# Altium PCB PCB1.PcbDoc (part 6 of 9)
Units mm, origin at the board's own origin, x right, y up, seen from the top; angles counter-clockwise.
Board outline 227 x 102 mm, 4 copper layers (Top Layer, MidLayer1, MidLayer2, Bottom Layer); 425 components, 426 nets, 1455 pads, 440 vias.
Unrouted connection lines stored in the file: 2.
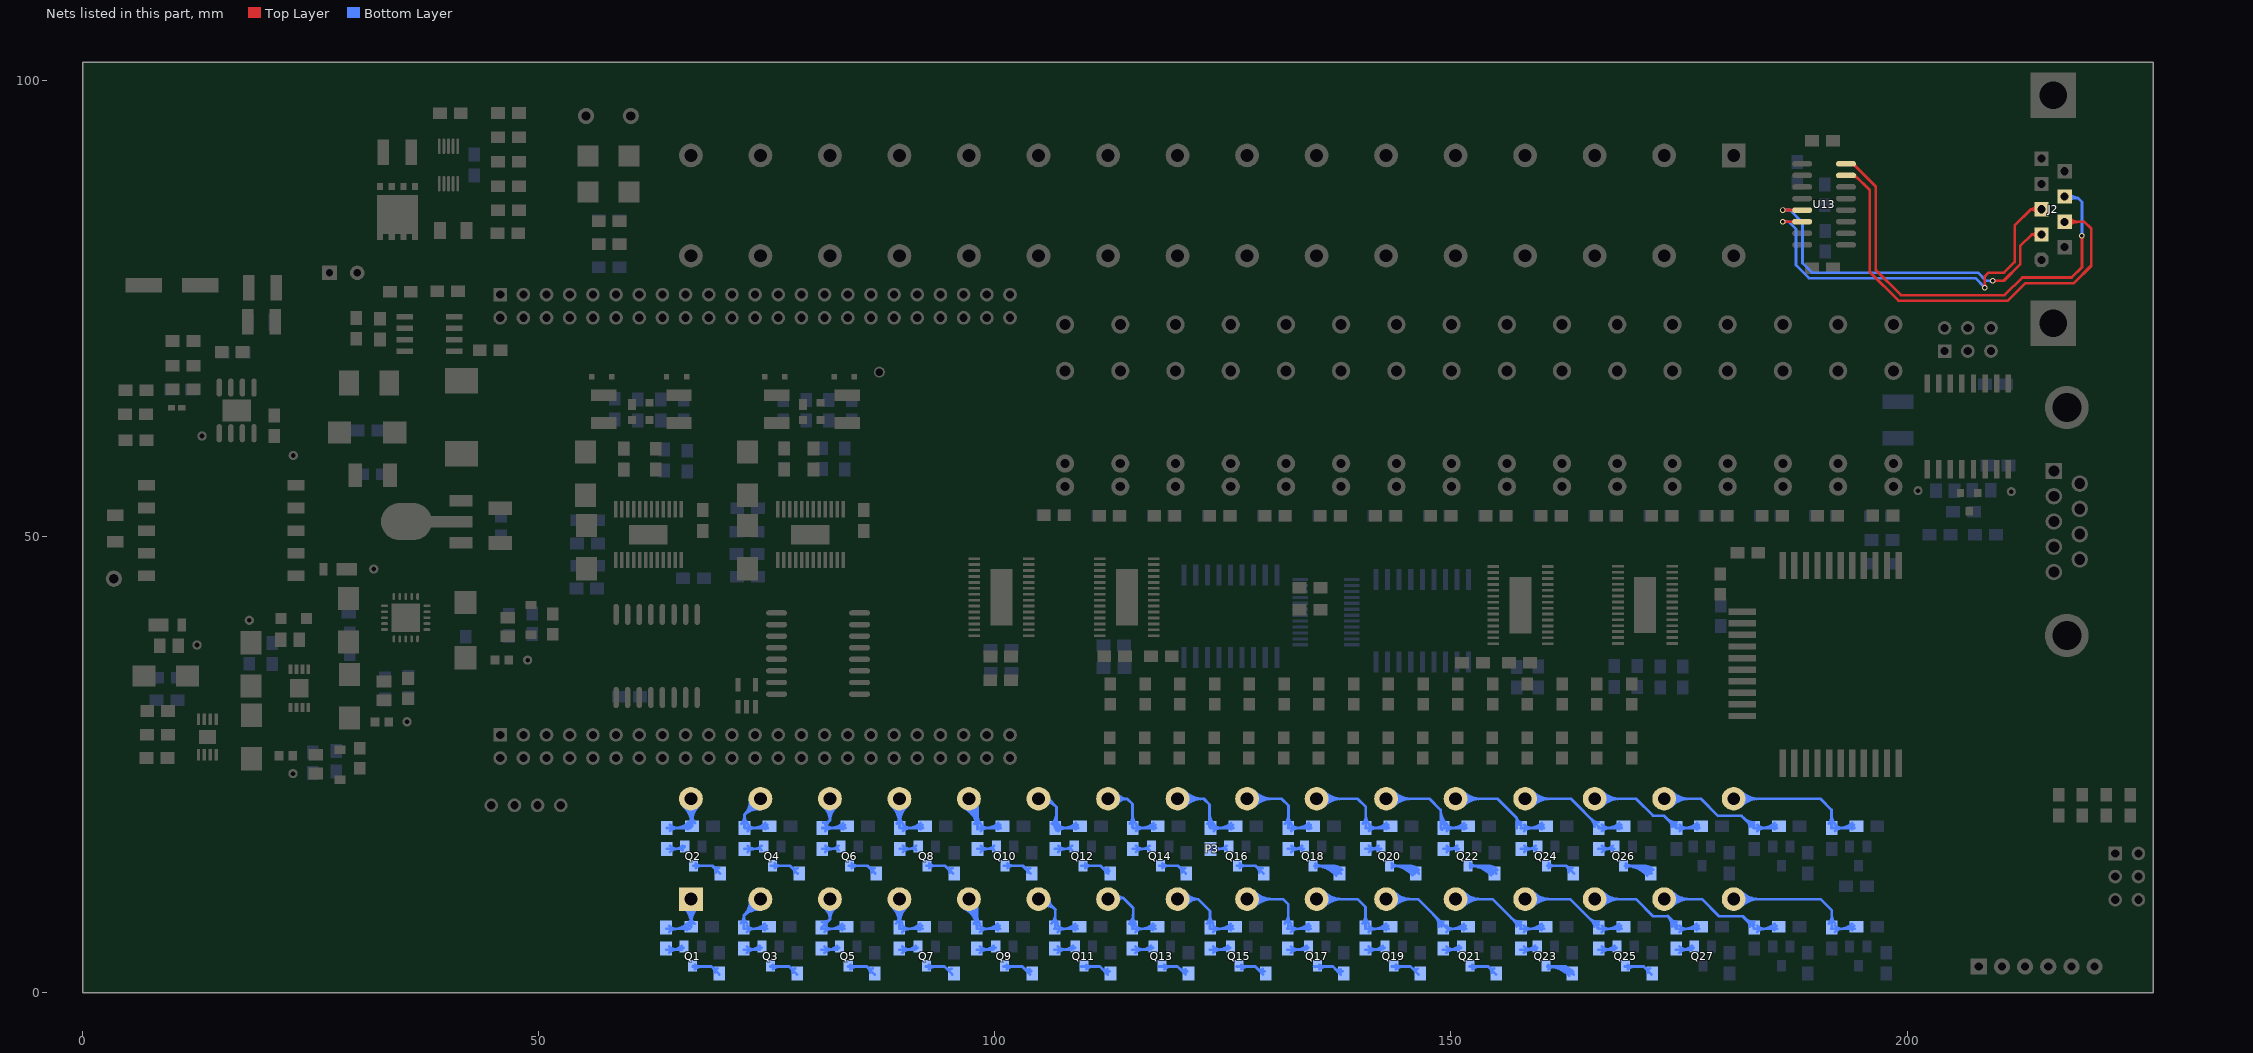
[diagram p8: the nets of this part, all layers, seen from the top]

## Via types
v1: diameter 0.6, hole 0.4, Top Layer to Bottom Layer, 427 vias
v2: diameter 0.5, hole 0.2, Top Layer to Bottom Layer, 9 vias
v3: diameter 0.66, hole 0.33, Top Layer to Bottom Layer, 4 vias

## Nets (pads, with @x,y where several pads share a name; then routed paths per layer and width w, separated by ;. In a path a pad name is that pad's centre, name@x,y a point inside that pad or via, vN(x,y) a via of type N, cw(c..) or ccw(c..) an arc to the next point about the centre after c; other vN are vias at no path point) (continued)
NetJ2_2: J2.2 U13.13 | length 43.6
  Top Layer w0.3: v1(186.37,85.823) 188.49,85.823 U13.13@188.5,85.813 ; v1@186.476,85.717 cw(c186.732,85.461) 186.732,85.823 cw(c186.732,86.185) v1@186.476,85.929 ; 187.313,85.823 cw(c187.313,85.426) U13.13@187.594,85.707 ; 187.363,85.823 ccw(c187.363,86.15) U13.13@187.594,85.919 ; v1@209.36,78.07 210.59,78.07 212.39,79.87 212.39,81.86 213.666,83.136 ; v1@209.476,77.954 cw(c209.756,77.674) 209.756,78.07 ; v1@209.476,78.166 ccw(c209.708,78.398) 209.708,78.07 ; J2.2@214.162,82.837 ccw(c213.666,82.575) 213.666,83.136 ; J2.2@214.162,83.434 cw(c213.666,83.697) 213.666,83.136 ; J2.2@214.725,83.136 213.666,83.136
  Bottom Layer w0.3: v1(186.37,85.823) 187.147,85.823 188.54,84.43 188.54,80 189.586,78.954 207.766,78.954 208.65,78.07 209.36,78.07 v1(209.37,78.06) ; v1@186.476,85.717 cw(c186.732,85.461) 186.732,85.823 cw(c186.732,86.185) v1@186.476,85.929 ; 208.984,78.07 cw(c208.984,77.674) v1@209.264,77.954 ; 209.032,78.07 ccw(c209.032,78.398) v1@209.264,78.166
NetJ2_3: J2.3 U13.14 | length 47
  Top Layer w0.3: v1(186.37,84.55) 188.74,84.55 U13.14@188.75,84.56 ; v1@186.476,84.444 cw(c186.732,84.188) 186.732,84.55 cw(c186.732,84.912) v1@186.476,84.656 ; 187.321,84.55 cw(c187.321,84.164) U13.14@187.594,84.437 ; 187.355,84.55 ccw(c187.355,84.888) U13.14@187.594,84.649 ; v1@208.404,77.426 ccw(c208.148,77.682) 208.51,77.682 ccw(c208.872,77.682) v1@208.616,77.426 ; v1(208.51,77.32) 208.51,78.54 208.93,78.96 210.63,78.96 211.79,80.12 211.79,84.14 213.559,85.909 ; J2.3@214.189,85.564 ccw(c213.559,85.16) 213.559,85.909 ; J2.3@214.189,86.253 cw(c213.559,86.657) 213.559,85.909 ; J2.3@214.725,85.909 213.559,85.909
  Bottom Layer w0.3: v1(186.37,84.55) 187.01,84.55 187.83,83.73 187.83,79.779 189.254,78.354 207.476,78.354 v1(208.51,77.32) ; v1@186.476,84.444 cw(c186.732,84.188) 186.732,84.55 cw(c186.732,84.912) v1@186.476,84.656 ; v1@208.36,77.32 ccw(c207.998,77.32) 208.254,77.576 ccw(c208.51,77.832) v1@208.51,77.47
NetJ2_7: J2.7 U13.7 | length 51
  Top Layer w0.3: U13.7@193.3,89.623 194.287,89.623 195.9,88.01 195.9,79.03 199.04,75.89 211.04,75.89 212.96,77.81 218.27,77.81 220.18,79.72 220.18,83.78 219.427,84.533 J2.7@217.265,84.533 ; U13.7@194.1,89.473 cw(c194.1,88.659) 194.675,89.235 ; J2.7@217.504,84.294 cw(c218.08,83.718) 218.08,84.533 cw(c218.08,85.347) J2.7@217.504,84.771 ; J2.7@217.716,84.082 cw(c218.804,82.994) 218.804,84.533 cw(c218.804,86.072) J2.7@217.716,84.984
NetJ2_8: J2.8 U13.8 | length 52.1
  Top Layer w0.3: U13.8@193.3,90.893 194.077,90.893 196.56,88.41 196.56,79.24 199.31,76.49 210.69,76.49 212.63,78.43 218.04,78.43 219.16,79.55 v1(219.16,83) ; U13.8@194.1,90.743 cw(c194.1,90.436) 194.317,90.653 ; U13.8@194.25,90.893 ccw(c194.668,90.893) 194.372,90.598 ; v1@219.054,82.894 cw(c218.798,82.638) 219.16,82.638 cw(c219.522,82.638) v1@219.266,82.894
  Bottom Layer w0.3: J2.8@217.265,87.306 217.431,87.14 218.73,87.14 ; J2.8@217.549,87.487 ccw(c218.183,87.891) 218.183,87.14 ; J2.8@217.716,86.855 cw(c218.404,86.167) 218.404,87.14 ; J2.8@217.802,87.649 ccw(c218.73,88.24) 218.73,87.14 ; v1@219.054,83.106 ccw(c218.798,83.362) 219.16,83.362 ccw(c219.522,83.362) v1@219.266,83.106 ; v1(219.16,83) 219.16,86.71 218.73,87.14
NetP3_1: P3.1 R9.2 R17.1 | length 20.8
  Bottom Layer w0.3: R17.1@63.97,7.04 R9.2@66.524,7.04 ; R17.1@64.303,6.69 cw(c65.148,5.845) 65.148,7.04 ; R17.1@64.303,7.376 ccw(c65.114,8.187) 65.114,7.04 ; 64.943,7.04 ccw(c64.943,8.894) R9.2@66.254,7.583 ; 65.668,7.04 ccw(c65.668,8.169) R9.2@66.466,7.371 ; P3.1@65.874,9.477 cw(c63.821,7.424) R9.2@66.724,7.424 ; 65.909,7.04 cw(c65.909,6.552) R9.2@66.254,6.897 ; P3.1@66.086,9.689 cw(c64.546,8.149) 66.724,8.149 ; P3.1@66.298,9.901 cw(c65.27,8.873) 66.724,8.873 ; R9.2@66.381,7.583 ccw(c65.553,8.411) 66.724,8.411 ccw(c67.895,8.411) R9.2@67.067,7.583 ; P3.1@66.687,10.29 66.724,10.253 R9.2@66.724,7.24 ; R9.2@66.724,7.603 cw(c69.374,7.603) P3.1@67.5,9.477 ; 66.724,8.327 cw(c68.65,8.327) P3.1@67.288,9.689
NetP3_2: P3.2 R10.2 R18.1 | length 21.1
  Bottom Layer w0.3: R18.1@64.05,18.09 66.604,18.09 R10.2@66.804,18.29 66.804,21.173 P3.2@66.687,21.29 ; R18.1@64.393,17.747 cw(c65.221,16.919) 65.221,18.09 cw(c65.221,19.261) R18.1@64.393,18.433 ; 65.023,18.09 ccw(c65.023,19.944) R10.2@66.334,18.633 ; 65.748,18.09 ccw(c65.748,19.219) R10.2@66.546,18.421 ; P3.2@65.885,20.466 cw(c63.764,18.288) R10.2@66.804,18.29 ; 65.989,18.09 cw(c65.989,17.602) R10.2@66.334,17.947 ; P3.2@66.094,20.681 cw(c64.456,18.999) 66.804,18.999 ; P3.2@66.303,20.896 cw(c65.148,19.71) 66.804,19.71 ; R10.2@66.461,18.633 ccw(c65.633,19.461) 66.804,19.461 ccw(c67.975,19.461) R10.2@67.147,18.633 ; R10.2@66.804,18.796 cw(c69.181,18.796) P3.2@67.5,20.477 ; 66.804,19.52 cw(c68.457,19.52) P3.2@67.288,20.689
NetP3_3: P3.3 R11.2 R19.1 | length 19.7
  Bottom Layer w0.3: R19.1@72.137,7.631 ccw(c71.303,8.468) 72.485,8.468 ; 72.485,8.445 ccw(c73.637,8.445) R19.1@72.822,7.63 ; R19.1@72.822,6.69 cw(c73.667,5.845) 73.667,7.04 ; R19.1@72.822,7.376 ccw(c73.633,8.187) 73.633,7.04 ; P3.3@73.159,10.228 cw(c70.85,10.103) 72.485,8.468 ; 73.458,7.04 ccw(c73.458,8.894) R11.2@74.769,7.583 ; P3.3@73.458,10.244 cw(c71.752,10.152) 72.96,8.943 cw(c74.169,7.735) P3.3@74.261,9.441 ; 74.182,7.04 ccw(c74.182,8.169) R11.2@74.981,7.371 ; P3.3@74.245,9.142 ccw(c74.12,6.833) 72.485,8.468 ; P3.3@74.307,10.29 72.485,8.468 ; 74.424,7.04 cw(c74.424,6.552) R11.2@74.769,6.897 ; R11.2@75.039,7.04 72.485,7.04 72.485,8.468
NetP3_4: P3.4 R12.2 R20.1 | length 19.2
  Bottom Layer w0.3: R20.1@72.22,18.56 ccw(c71.392,19.388) 72.563,19.388 ccw(c73.734,19.388) R20.1@72.906,18.56 ; R20.1@72.559,18.09 R12.2@75.113,18.09 ; R20.1@72.563,18.09 72.563,19.546 ; R20.1@72.906,17.747 cw(c73.734,16.919) 73.734,18.09 cw(c73.734,19.261) R20.1@72.906,18.433 ; P3.4@73.161,21.19 cw(c71.101,21.009) 72.563,19.546 ; P3.4@73.46,21.216 cw(c71.937,21.082) 73.018,20.001 cw(c74.099,18.92) P3.4@74.233,20.443 ; 73.533,18.09 ccw(c73.533,19.944) R12.2@74.843,18.633 ; P3.4@74.207,20.144 ccw(c74.026,18.084) 72.563,19.546 ; 74.257,18.09 ccw(c74.257,19.219) R12.2@75.056,18.421 ; P3.4@74.307,21.29 72.563,19.546 ; 74.498,18.09 cw(c74.498,17.602) R12.2@74.843,17.947
NetP3_5: P3.5 R13.2 R21.1 | length 17.4
  Bottom Layer w0.3: R21.1@80.999,7.04 R13.2@83.553,7.04 ; R21.1@80.999,7.16 81.927,8.088 ; R21.1@81.044,7.77 ccw(c81.147,8.869) 81.927,8.088 ; P3.5@81.27,9.346 cw(c80.395,8.088) 81.927,8.088 ; R21.1@81.342,6.69 cw(c82.186,5.845) 82.186,7.04 ; R21.1@81.342,7.376 ccw(c82.153,8.187) 82.153,7.04 ; P3.5@81.441,9.592 cw(c80.794,8.663) 81.927,8.663 cw(c83.06,8.663) P3.5@82.413,9.592 ; R21.1@81.484,7.287 cw(c82.348,7.287) 81.737,7.898 ; P3.5@81.927,10.29 81.927,8.088 ; 81.973,7.04 ccw(c81.973,8.894) R13.2@83.283,7.583 ; P3.5@82.584,9.346 ccw(c83.459,8.088) 81.927,8.088 ; 82.697,7.04 ccw(c82.697,8.169) R13.2@83.496,7.371 ; 82.938,7.04 cw(c82.938,6.552) R13.2@83.283,6.897
NetP3_6: P3.6 R14.2 R22.1 | length 17.5
  Bottom Layer w0.3: R22.1@81.069,18.09 R14.2@83.623,18.09 ; R22.1@81.175,18.692 ccw(c81.342,19.502) 81.927,18.917 ; P3.6@81.214,20.387 cw(c80.054,18.917) 81.927,18.917 ; P3.6@81.4,20.623 cw(c80.543,19.536) 81.927,19.536 cw(c83.311,19.536) P3.6@82.454,20.623 ; R22.1@81.42,17.747 cw(c82.248,16.919) 82.248,18.09 cw(c82.248,19.261) R22.1@81.42,18.433 ; R22.1@81.45,18.44 81.927,18.917 ; R22.1@81.562,18.217 cw(c82.37,18.217) 81.798,18.788 ; P3.6@81.927,21.29 81.927,18.917 ; 82.042,18.09 ccw(c82.042,19.944) R14.2@83.353,18.633 ; P3.6@82.64,20.387 ccw(c83.8,18.917) 81.927,18.917 ; 82.766,18.09 ccw(c82.766,19.219) R14.2@83.565,18.421 ; 83.008,18.09 cw(c83.008,17.602) R14.2@83.353,17.947
NetP3_7: P3.7 R15.2 R23.1 | length 21.8
  Bottom Layer w0.3: P3.7@88.734,9.477 cw(c86.771,7.514) 89.547,7.514 cw(c92.323,7.514) P3.7@90.36,9.477 ; P3.7@88.946,9.689 cw(c87.495,8.238) 89.547,8.238 cw(c91.599,8.238) P3.7@90.148,9.689 ; P3.7@89.158,9.901 cw(c88.219,8.962) 89.547,8.962 cw(c90.875,8.962) P3.7@89.936,9.901 ; R23.1@89.175,7.63 ccw(c88.277,8.528) 89.547,8.528 ; R23.1@89.514,7.04 R15.2@92.068,7.04 ; R23.1@89.518,7.16 89.547,7.189 P3.7@89.547,10.29 ; 89.547,8.388 ccw(c90.619,8.388) R23.1@89.861,7.63 ; R23.1@89.861,6.69 cw(c90.706,5.845) 90.706,7.04 ; R23.1@89.861,7.376 ccw(c90.672,8.187) 90.672,7.04 ; 90.487,7.04 ccw(c90.487,8.894) R15.2@91.798,7.583 ; 91.212,7.04 ccw(c91.212,8.169) R15.2@92.01,7.371 ; 91.453,7.04 cw(c91.453,6.552) R15.2@91.798,6.897
NetP3_8: P3.8 R16.2 R24.1 | length 21.8
  Bottom Layer w0.3: P3.8@88.734,20.477 cw(c86.771,18.514) 89.547,18.514 cw(c92.323,18.514) P3.8@90.36,20.477 ; P3.8@88.946,20.689 cw(c87.495,19.238) 89.547,19.238 cw(c91.599,19.238) P3.8@90.148,20.689 ; P3.8@89.158,20.901 cw(c88.219,19.962) 89.547,19.962 cw(c90.875,19.962) P3.8@89.936,20.901 ; R24.1@89.247,18.56 ccw(c88.523,19.284) 89.547,19.284 ; 89.547,19.492 ccw(c90.865,19.492) R24.1@89.933,18.56 ; P3.8@89.547,21.29 89.547,18.121 89.578,18.09 R16.2@92.132,18.09 ; R24.1@89.933,17.747 cw(c90.761,16.919) 90.761,18.09 cw(c90.761,19.261) R24.1@89.933,18.433 ; 90.551,18.09 ccw(c90.551,19.944) R16.2@91.862,18.633 ; 91.276,18.09 ccw(c91.276,19.219) R16.2@92.074,18.421 ; 91.517,18.09 cw(c91.517,17.602) R16.2@91.862,17.947
NetP3_9: P3.9 R33.2 R41.1 | length 23.6
  Bottom Layer w0.3: P3.9@96.658,9.259 cw(c95.565,7.041) R41.1@98.037,7.041 ; P3.9@96.791,9.528 cw(c95.803,7.524) R41.1@98.037,7.524 ; P3.9@96.924,9.797 cw(c96.041,8.006) 98.037,8.006 ; P3.9@97.056,10.066 cw(c96.279,8.489) 98.037,8.489 ; P3.9@97.167,10.29 98.037,9.42 R41.1@98.037,7.16 ; P3.9@97.189,10.335 cw(c96.517,8.971) 98.037,8.971 ; R41.1@97.694,7.63 ccw(c96.866,8.458) 98.037,8.458 ccw(c99.208,8.458) R41.1@98.38,7.63 ; R41.1@98.029,7.04 R33.2@100.583,7.04 ; R41.1@98.38,6.69 cw(c99.225,5.845) 99.225,7.04 ; R41.1@98.38,7.376 ccw(c99.191,8.187) 99.191,7.04 ; 99.002,7.04 ccw(c99.002,8.894) R33.2@100.313,7.583 ; 99.726,7.04 ccw(c99.726,8.169) R33.2@100.525,7.371 ; 99.968,7.04 cw(c99.968,6.552) R33.2@100.313,6.897
NetP3_10: P3.10 R34.2 R42.1 | length 24.1
  Bottom Layer w0.3: P3.10@96.658,20.259 cw(c95.525,17.96) R42.1@98.087,17.96 ; P3.10@96.791,20.528 cw(c95.763,18.443) R42.1@98.087,18.443 ; P3.10@96.924,20.797 cw(c96.001,18.925) 98.087,18.925 ; P3.10@97.056,21.066 cw(c96.239,19.408) 98.087,19.408 ; P3.10@97.167,21.29 98.087,20.37 R42.1@98.087,18.09 ; P3.10@97.189,21.335 cw(c96.477,19.89) 98.087,19.89 ; R42.1@97.76,18.56 ccw(c96.971,19.349) 98.087,19.349 ; 98.087,19.427 ccw(c99.313,19.427) R42.1@98.446,18.56 ; R42.1@98.103,18.09 R34.2@100.641,18.09 ; R42.1@98.446,17.747 cw(c99.274,16.919) 99.274,18.09 cw(c99.274,19.261) R42.1@98.446,18.433 ; 99.061,18.09 ccw(c99.061,19.944) R34.2@100.371,18.633 ; 99.785,18.09 ccw(c99.785,19.219) R34.2@100.584,18.421 ; 100.026,18.09 cw(c100.026,17.602) R34.2@100.371,17.947
NetP3_11: P3.11 R35.2 R43.1 | length 17.4
  Bottom Layer w0.3: P3.11@104.787,10.29 105.49,10.29 106.62,9.16 106.62,7.117 106.543,7.04 R35.2@109.097,7.04 ; P3.11@104.974,9.773 cw(c105.406,8.578) 106.304,9.476 ; P3.11@105.076,9.491 cw(c105.583,8.088) 106.638,9.142 ; P3.11@105.937,10.29 ccw(c107.016,10.29) 106.253,9.527 ; R43.1@106.214,7.63 ccw(c105.233,8.611) 106.62,8.611 ; 106.62,8.305 ccw(c107.575,8.305) R43.1@106.9,7.63 ; R43.1@106.9,6.69 cw(c107.744,5.845) 107.744,7.04 ; R43.1@106.9,7.376 ccw(c107.711,8.187) 107.711,7.04 ; 107.517,7.04 ccw(c107.517,8.894) R35.2@108.827,7.583 ; 108.241,7.04 ccw(c108.241,8.169) R35.2@109.04,7.371 ; 108.482,7.04 cw(c108.482,6.552) R35.2@108.827,6.897
NetP3_12: P3.12 R36.2 R44.1 | length 18
  Bottom Layer w0.3: P3.12@104.787,21.29 105.86,21.29 106.76,20.39 106.76,17.9 R44.1@106.72,17.86 ; P3.12@104.888,21.061 cw(c105.424,19.842) 106.366,20.784 ; P3.12@105.009,20.787 cw(c105.614,19.411) 106.676,20.474 ; R44.1@106.274,18.56 ccw(c105.1,19.734) 106.76,19.734 ; R44.1@106.486,18.348 ccw(c105.824,19.01) 106.76,19.01 ; R44.1@106.597,18.09 R36.2@109.151,18.09 ; 106.76,19.042 ccw(c107.442,19.042) R44.1@106.96,18.56 ; R44.1@106.96,17.747 cw(c107.788,16.919) 107.788,18.09 cw(c107.788,19.261) R44.1@106.96,18.433 ; 107.57,18.09 ccw(c107.57,19.944) R36.2@108.881,18.633 ; 108.294,18.09 ccw(c108.294,19.219) R36.2@109.093,18.421 ; 108.536,18.09 cw(c108.536,17.602) R36.2@108.881,17.947
NetP3_13: P3.13 R37.2 R45.1 | length 16.7
  Bottom Layer w0.3: P3.13@112.2,10.44 114.05,10.44 ; P3.13@113.428,10.818 ccw(c114.05,11.14) 114.05,10.44 ; P3.13@113.526,10.026 cw(c114.05,9.902) 114.05,10.44 ; R45.1@114.733,7.63 ccw(c113.678,8.685) 115.17,8.685 ; R45.1@114.945,7.418 ccw(c114.402,7.961) 115.17,7.961 ; R45.1@115.058,7.04 R37.2@117.612,7.04 ; R45.1@115.076,7.16 115.17,7.254 115.17,9.32 114.05,10.44 ; 115.17,8.231 ccw(c116.02,8.231) R45.1@115.419,7.63 ; R45.1@115.419,6.69 cw(c116.264,5.845) 116.264,7.04 ; R45.1@115.419,7.376 ccw(c116.23,8.187) 116.23,7.04 ; 116.031,7.04 ccw(c116.031,8.894) R37.2@117.342,7.583 ; 116.756,7.04 ccw(c116.756,8.169) R37.2@117.554,7.371 ; 116.997,7.04 cw(c116.997,6.552) R37.2@117.342,6.897
NetP3_14: P3.14 R38.2 R46.1 | length 19.2
  Bottom Layer w0.3: P3.14@112.407,21.29 114.5,21.29 ; P3.14@113.124,20.834 cw(c113.954,20.307) 113.954,21.29 cw(c113.954,22.273) P3.14@113.124,21.746 ; P3.14@113.378,20.673 cw(c114.5,19.961) 114.5,21.29 ; P3.14@113.378,21.907 ccw(c114.5,22.619) 114.5,21.29 ; R46.1@114.787,18.56 ccw(c114.056,19.291) 115.09,19.291 ; 115.09,19.484 ccw(c116.397,19.484) R46.1@115.473,18.56 ; R46.1@115.106,18.09 R38.2@117.66,18.09 ; R46.1@115.13,18.09 115.09,18.13 115.09,20.7 114.5,21.29 ; R46.1@115.473,17.747 cw(c116.301,16.919) 116.301,18.09 cw(c116.301,19.261) R46.1@115.473,18.433 ; 116.079,18.09 ccw(c116.079,19.944) R38.2@117.39,18.633 ; 116.804,18.09 ccw(c116.804,19.219) R38.2@117.602,18.421 ; 117.045,18.09 cw(c117.045,17.602) R38.2@117.39,17.947
NetP3_15: P3.15 R39.2 R47.1 | length 20.2
  Bottom Layer w0.3: P3.15@120.027,10.29 122.27,10.29 ; P3.15@120.717,9.794 cw(c121.685,9.098) 121.685,10.29 cw(c121.685,11.482) P3.15@120.717,10.786 ; P3.15@120.961,9.619 cw(c122.27,8.678) 122.27,10.29 ; P3.15@120.961,10.961 ccw(c122.27,11.902) 122.27,10.29 ; R47.1@123.252,7.63 ccw(c122.461,8.421) 123.58,8.421 ; R47.1@123.573,7.04 R39.2@126.127,7.04 ; 123.58,8.495 ccw(c124.803,8.495) R47.1@123.938,7.63 ; R47.1@123.595,7.16 123.58,7.175 123.58,8.98 122.27,10.29 ; R47.1@123.938,6.69 cw(c124.783,5.845) 124.783,7.04 ; R47.1@123.938,7.376 ccw(c124.749,8.187) 124.749,7.04 ; 124.546,7.04 ccw(c124.546,8.894) R39.2@125.857,7.583 ; 125.27,7.04 ccw(c125.27,8.169) R39.2@126.069,7.371 ; 125.512,7.04 cw(c125.512,6.552) R39.2@125.857,6.897
NetP3_16: P3.16 R40.2 R48.1 | length 25.7
  Bottom Layer w0.3: P3.16@120.027,21.29 122.9,21.29 123.53,20.66 123.53,18.203 R48.1@123.643,18.09 ; P3.16@120.416,20.901 cw(c121.355,19.962) 121.355,21.29 cw(c121.355,22.618) P3.16@120.416,21.679 ; P3.16@120.628,20.689 cw(c122.079,19.238) 122.079,21.29 cw(c122.079,23.342) P3.16@120.628,21.891 ; P3.16@120.84,20.477 cw(c122.803,18.514) 122.803,21.29 cw(c122.803,24.066) P3.16@120.84,22.103 ; R48.1@123.3,18.56 ccw(c122.746,19.114) 123.53,19.114 ; 123.53,18.937 ccw(c124.364,18.937) R48.1@123.774,18.348 ; 123.53,19.662 ccw(c125.088,19.662) R48.1@123.986,18.56 ; R48.1@123.615,18.09 R40.2@126.169,18.09 ; R48.1@123.986,17.747 cw(c124.814,16.919) 124.814,18.09 cw(c124.814,19.261) R48.1@123.986,18.433 ; 124.589,18.09 ccw(c124.589,19.944) R40.2@125.899,18.633 ; 125.313,18.09 ccw(c125.313,19.219) R40.2@126.112,18.421 ; 125.554,18.09 cw(c125.554,17.602) R40.2@125.899,17.947
NetP3_17: P3.17 R57.2 R65.1 | length 26
  Bottom Layer w0.3: P3.17@127.647,10.29 131.57,10.29 132.17,9.69 132.17,7.215 R65.1@132.115,7.16 ; P3.17@128.036,9.901 cw(c128.975,8.962) 128.975,10.29 cw(c128.975,11.618) P3.17@128.036,10.679 ; P3.17@128.248,9.689 cw(c129.699,8.238) 129.699,10.29 cw(c129.699,12.342) P3.17@128.248,10.891 ; P3.17@128.46,9.477 cw(c130.423,7.514) 130.423,10.29 cw(c130.423,13.066) P3.17@128.46,11.103 ; R65.1@131.772,7.63 ccw(c130.81,8.591) 132.17,8.591 ; R65.1@132.087,7.04 R57.2@134.641,7.04 ; 132.17,8.324 ccw(c133.152,8.324) R65.1@132.458,7.63 ; R65.1@132.458,6.69 cw(c133.302,5.845) 133.302,7.04 ; R65.1@132.458,7.376 ccw(c133.269,8.187) 133.269,7.04 ; 133.061,7.04 ccw(c133.061,8.894) R57.2@134.371,7.583 ; 133.785,7.04 ccw(c133.785,8.169) R57.2@134.584,7.371 ; 134.026,7.04 cw(c134.026,6.552) R57.2@134.371,6.897
NetP3_18: P3.18 R58.2 R66.1 | length 25.9
  Bottom Layer w0.3: P3.18@127.647,21.29 131.44,21.29 132.18,20.55 132.18,18.113 R66.1@132.157,18.09 ; P3.18@128.036,20.901 cw(c128.975,19.962) 128.975,21.29 cw(c128.975,22.618) P3.18@128.036,21.679 ; P3.18@128.248,20.689 cw(c129.699,19.238) 129.699,21.29 cw(c129.699,23.342) P3.18@128.248,21.891 ; P3.18@128.46,20.477 cw(c130.423,18.514) 130.423,21.29 cw(c130.423,24.066) P3.18@128.46,22.103 ; R66.1@131.814,18.56 ccw(c130.929,19.444) 132.18,19.444 ; R66.1@132.125,18.09 R58.2@134.679,18.09 ; 132.18,19.332 ccw(c133.271,19.332) R66.1@132.5,18.56 ; R66.1@132.5,17.747 cw(c133.328,16.919) 133.328,18.09 cw(c133.328,19.261) R66.1@132.5,18.433 ; 133.098,18.09 ccw(c133.098,19.944) R58.2@134.409,18.633 ; 133.822,18.09 ccw(c133.822,19.219) R58.2@134.621,18.421 ; 134.064,18.09 cw(c134.064,17.602) R58.2@134.409,17.947
NetP3_19: P3.19 R59.2 R67.1 | length 26.6
  Bottom Layer w0.3: P3.19@135.267,10.29 139.76,10.29 140.634,9.416 R67.1@140.634,7.16 ; P3.19@135.656,9.901 cw(c136.595,8.962) 136.595,10.29 cw(c136.595,11.618) P3.19@135.656,10.679 ; P3.19@135.868,9.689 cw(c137.319,8.238) 137.319,10.29 cw(c137.319,12.342) P3.19@135.868,10.891 ; P3.19@136.08,9.477 cw(c138.043,7.514) 138.043,10.29 cw(c138.043,13.066) P3.19@136.08,11.103 ; R67.1@140.291,7.63 ccw(c139.463,8.458) 140.634,8.458 ccw(c141.805,8.458) R67.1@140.977,7.63 ; R67.1@140.602,7.04 R59.2@143.156,7.04 ; R67.1@140.977,6.69 cw(c141.822,5.845) 141.822,7.04 ; R67.1@140.977,7.376 ccw(c141.788,8.187) 141.788,7.04 ; 141.575,7.04 ccw(c141.575,8.894) R59.2@142.886,7.583 ; 142.3,7.04 ccw(c142.3,8.169) R59.2@143.098,7.371 ; 142.541,7.04 cw(c142.541,6.552) R59.2@142.886,6.897
NetP3_20: P3.20 R60.2 R68.1 | length 26.7
  Bottom Layer w0.3: P3.20@135.267,21.29 139.76,21.29 140.67,20.38 R68.1@140.67,18.09 ; P3.20@135.656,20.901 cw(c136.595,19.962) 136.595,21.29 cw(c136.595,22.618) P3.20@135.656,21.679 ; P3.20@135.868,20.689 cw(c137.319,19.238) 137.319,21.29 cw(c137.319,23.342) P3.20@135.868,21.891 ; P3.20@136.08,20.477 cw(c138.043,18.514) 138.043,21.29 cw(c138.043,24.066) P3.20@136.08,22.103 ; R68.1@140.327,18.56 ccw(c139.499,19.388) 140.67,19.388 ccw(c141.841,19.388) R68.1@141.013,18.56 ; R68.1@140.634,18.09 R60.2@143.188,18.09 ; R68.1@141.013,17.747 cw(c141.841,16.919) 141.841,18.09 cw(c141.841,19.261) R68.1@141.013,18.433 ; 141.607,18.09 ccw(c141.607,19.944) R60.2@142.918,18.633 ; 142.332,18.09 ccw(c142.332,19.219) R60.2@143.13,18.421 ; 142.573,18.09 cw(c142.573,17.602) R60.2@142.918,17.947
NetP3_21: P3.21 R61.2 R69.1 | length 27
  Bottom Layer w0.3: P3.21@142.887,10.29 146.38,10.29 149.63,7.04 R61.2@151.671,7.04 ; P3.21@143.276,9.901 cw(c144.215,8.962) 144.215,10.29 cw(c144.215,11.618) P3.21@143.276,10.679 ; P3.21@143.488,9.689 cw(c144.939,8.238) 144.939,10.29 cw(c144.939,12.342) P3.21@143.488,10.891 ; P3.21@143.7,9.477 cw(c145.663,7.514) 145.663,10.29 cw(c145.663,13.066) P3.21@143.7,11.103 ; 148.163,8.507 cw(c146.943,7.287) R69.1@148.668,7.287 ; 148.675,7.995 cw(c147.967,7.287) R69.1@148.968,7.287 ; 148.717,7.953 ccw(c149.153,8.388) R69.1@149.153,7.772 ; R69.1@149.496,6.69 cw(c150.341,5.845) 150.341,7.04 ; R69.1@149.496,7.376 ccw(c150.307,8.187) 150.307,7.04 ; 150.09,7.04 ccw(c150.09,8.894) R61.2@151.401,7.583 ; 150.814,7.04 ccw(c150.814,8.169) R61.2@151.613,7.371 ; 151.056,7.04 cw(c151.056,6.552) R61.2@151.401,6.897
NetP3_22: P3.22 R62.2 R70.1 | length 28.4
  Bottom Layer w0.3: P3.22@142.887,21.29 147.66,21.29 148.87,20.08 ; P3.22@143.276,20.901 cw(c144.215,19.962) 144.215,21.29 cw(c144.215,22.618) P3.22@143.276,21.679 ; P3.22@143.488,20.689 cw(c144.939,19.238) 144.939,21.29 cw(c144.939,23.342) P3.22@143.488,21.891 ; P3.22@143.7,20.477 cw(c145.663,18.514) 145.663,21.29 cw(c145.663,24.066) P3.22@143.7,22.103 ; 148.87,19.38 ccw(c150.291,19.38) R70.1@149.311,18.351 ; R70.1@149.03,17.88 148.87,18.04 148.87,20.08 ; R70.1@149.143,18.09 R62.2@151.697,18.09 ; R70.1@149.518,18.568 cw(c150.958,20.08) 148.87,20.08 ; R70.1@149.526,17.747 cw(c150.354,16.919) 150.354,18.09 cw(c150.354,19.261) R70.1@149.526,18.433 ; 150.117,18.09 ccw(c150.117,19.944) R62.2@151.427,18.633 ; 150.841,18.09 ccw(c150.841,19.219) R62.2@151.64,18.421 ; 151.082,18.09 cw(c151.082,17.602) R62.2@151.427,17.947
NetP3_23: P3.23 R63.2 R71.1 | length 27.7
  Bottom Layer w0.3: P3.23@150.507,10.29 154.543,10.29 R71.1@157.673,7.16 ; P3.23@150.896,9.901 cw(c151.835,8.962) 151.835,10.29 cw(c151.835,11.618) P3.23@150.896,10.679 ; P3.23@151.108,9.689 cw(c152.559,8.238) 152.559,10.29 cw(c152.559,12.342) P3.23@151.108,10.891 ; P3.23@151.32,9.477 cw(c153.283,7.514) 153.283,10.29 cw(c153.283,13.066) P3.23@151.32,11.103 ; 156.628,8.205 ccw(c157.673,9.25) R71.1@157.673,7.772 ; 156.935,7.898 cw(c156.323,7.287) R71.1@157.188,7.287 ; R71.1@157.14,7.693 ccw(c157.673,8.225) R71.1@157.673,7.472 ; R71.1@157.631,7.04 R63.2@160.185,7.04 ; R71.1@158.016,6.69 cw(c158.86,5.845) 158.86,7.04 ; R71.1@158.016,7.376 ccw(c158.827,8.187) 158.827,7.04 ; 158.605,7.04 ccw(c158.605,8.894) R63.2@159.915,7.583 ; 159.329,7.04 ccw(c159.329,8.169) R63.2@160.128,7.371 ; 159.57,7.04 cw(c159.57,6.552) R63.2@159.915,6.897
NetP3_24: P3.24 R64.2 R72.1 | length 27.1
  Bottom Layer w0.3: P3.24@150.507,21.29 155.12,21.29 157.2,19.21 ; P3.24@150.896,20.901 cw(c151.835,19.962) 151.835,21.29 cw(c151.835,22.618) P3.24@150.896,21.679 ; P3.24@151.108,20.689 cw(c152.559,19.238) 152.559,21.29 cw(c152.559,23.342) P3.24@151.108,21.891 ; P3.24@151.32,20.477 cw(c153.283,18.514) 153.283,21.29 cw(c153.283,24.066) P3.24@151.32,22.103 ; R72.1@157.2,18.07 157.2,19.21 ; 157.2,18.907 ccw(c157.705,18.907) R72.1@157.699,18.402 ; R72.1@157.653,18.09 R64.2@160.207,18.09 ; R72.1@157.702,18.702 cw(c157.708,19.21) 157.2,19.21 ; R72.1@158.04,17.747 cw(c158.868,16.919) 158.868,18.09 cw(c158.868,19.261) R72.1@158.04,18.433 ; 158.626,18.09 ccw(c158.626,19.944) R64.2@159.937,18.633 ; 159.35,18.09 ccw(c159.35,19.219) R64.2@160.149,18.421 ; 159.592,18.09 cw(c159.592,17.602) R64.2@159.937,17.947
NetP3_25: P3.25 R81.2 R89.1 | length 28.7
  Bottom Layer w0.3: P3.25@158.127,10.29 163.06,10.29 166.05,7.3 166.05,7.16 R89.1@166.192,7.16 ; P3.25@158.516,9.901 cw(c159.455,8.962) 159.455,10.29 cw(c159.455,11.618) P3.25@158.516,10.679 ; P3.25@158.728,9.689 cw(c160.179,8.238) 160.179,10.29 cw(c160.179,12.342) P3.25@158.728,10.891 ; P3.25@158.94,9.477 cw(c160.903,7.514) 160.903,10.29 cw(c160.903,13.066) P3.25@158.94,11.103 ; 165.144,8.206 ccw(c166.192,9.254) R89.1@166.192,7.772 ; 165.455,7.895 cw(c164.848,7.287) R89.1@165.707,7.287 ; R89.1@165.656,7.694 ccw(c166.192,8.23) R89.1@166.192,7.472 ; R89.1@166.146,7.04 R81.2@168.7,7.04 ; R89.1@166.535,6.69 cw(c167.38,5.845) 167.38,7.04 ; R89.1@166.535,7.376 ccw(c167.346,8.187) 167.346,7.04 ; 167.119,7.04 ccw(c167.119,8.894) R81.2@168.43,7.583 ; 167.844,7.04 ccw(c167.844,8.169) R81.2@168.642,7.371 ; 168.085,7.04 cw(c168.085,6.552) R81.2@168.43,6.897
NetP3_26: P3.26 R82.2 R90.1 | length 28
  Bottom Layer w0.3: P3.26@158.127,21.29 163.14,21.29 166.162,18.268 R90.1@166.162,18.09 ; P3.26@158.516,20.901 cw(c159.455,19.962) 159.455,21.29 cw(c159.455,22.618) P3.26@158.516,21.679 ; P3.26@158.728,20.689 cw(c160.179,19.238) 160.179,21.29 cw(c160.179,23.342) P3.26@158.728,21.891 ; P3.26@158.94,20.477 cw(c160.903,18.514) 160.903,21.29 cw(c160.903,24.066) P3.26@158.94,22.103 ; 165.38,19.05 cw(c164.547,18.217) R90.1@165.725,18.217 ; 165.387,19.043 ccw(c166.21,19.866) R90.1@166.21,18.702 ; R90.1@166.21,18.09 R82.2@168.716,18.09 ; R90.1@166.553,17.747 cw(c167.381,16.919) 167.381,18.09 cw(c167.381,19.261) R90.1@166.553,18.433 ; 167.135,18.09 ccw(c167.135,19.944) R82.2@168.446,18.633 ; 167.86,18.09 ccw(c167.86,19.219) R82.2@168.658,18.421 ; 168.101,18.09 cw(c168.101,17.602) R82.2@168.446,17.947
NetP3_27: P3.27 R83.2 R91.1 | length 29.8
  Bottom Layer w0.3: P3.27@165.747,10.29 170.28,10.29 172.16,8.41 173.78,8.41 174.711,7.479 R91.1@174.711,7.16 ; P3.27@166.136,9.901 cw(c167.075,8.962) 167.075,10.29 cw(c167.075,11.618) P3.27@166.136,10.679 ; P3.27@166.348,9.689 cw(c167.799,8.238) 167.799,10.29 cw(c167.799,12.342) P3.27@166.348,10.891 ; P3.27@166.56,9.477 cw(c168.523,7.514) 168.523,10.29 cw(c168.523,13.066) P3.27@166.56,11.103 ; 173.748,8.442 cw(c172.593,7.287) R91.1@174.226,7.287 ; 174.211,7.979 ccw(c174.711,8.48) R91.1@174.711,7.772 ; 174.26,7.93 cw(c173.617,7.287) R91.1@174.526,7.287 ; R91.1@174.661,7.04 R83.2@177.215,7.04 ; R91.1@175.054,6.69 cw(c175.899,5.845) 175.899,7.04 ; R91.1@175.054,7.376 ccw(c175.865,8.187) 175.865,7.04 ; 175.634,7.04 ccw(c175.634,8.894) R83.2@176.945,7.583 ; 176.358,7.04 ccw(c176.358,8.169) R83.2@177.157,7.371 ; 176.6,7.04 cw(c176.6,6.552) R83.2@176.945,6.897
NetP3_28: P3.28 R84.2 R92.1 | length 29.6
  Bottom Layer w0.3: P3.28@165.747,21.29 170.28,21.29 172.13,19.44 173.321,19.44 174.671,18.09 R84.2@177.225,18.09 ; P3.28@166.136,20.901 cw(c167.075,19.962) 167.075,21.29 cw(c167.075,22.618) P3.28@166.136,21.679 ; P3.28@166.348,20.689 cw(c167.799,19.238) 167.799,21.29 cw(c167.799,23.342) P3.28@166.348,21.891 ; P3.28@166.56,20.477 cw(c168.523,18.514) 168.523,21.29 cw(c168.523,24.066) P3.28@166.56,22.103 ; 173.59,19.172 ccw(c174.723,20.305) R92.1@174.723,18.702 ; 174.022,18.739 cw(c173.5,18.217) R92.1@174.238,18.217 ; R92.1@174.102,18.659 ccw(c174.723,19.281) R92.1@174.723,18.402 ; R92.1@175.066,17.747 cw(c175.894,16.919) 175.894,18.09 cw(c175.894,19.261) R92.1@175.066,18.433 ; 175.645,18.09 ccw(c175.645,19.944) R84.2@176.955,18.633 ; 176.369,18.09 ccw(c176.369,19.219) R84.2@177.168,18.421 ; 176.61,18.09 cw(c176.61,17.602) R84.2@176.955,17.947
NetP3_29: P3.29 R85.2 R93.1 | length 30.4
  Bottom Layer w0.3: P3.29@173.367,10.29 177.5,10.29 179.38,8.41 181.981,8.41 R93.1@183.231,7.16 ; P3.29@173.756,9.901 cw(c174.695,8.962) 174.695,10.29 cw(c174.695,11.618) P3.29@173.756,10.679 ; P3.29@173.968,9.689 cw(c175.419,8.238) 175.419,10.29 cw(c175.419,12.342) P3.29@173.968,10.891 ; P3.29@174.18,9.477 cw(c176.143,7.514) 176.143,10.29 cw(c176.143,13.066) P3.29@174.18,11.103 ; 182.186,8.205 ccw(c183.231,9.25) R93.1@183.231,7.772 ; 182.493,7.898 cw(c181.881,7.287) R93.1@182.746,7.287 ; R93.1@182.698,7.693 ccw(c183.231,8.225) R93.1@183.231,7.472 ; R93.1@183.175,7.04 R85.2@185.729,7.04 ; R93.1@183.574,6.69 cw(c184.418,5.845) 184.418,7.04 ; R93.1@183.574,7.376 ccw(c184.385,8.187) 184.385,7.04 ; 184.149,7.04 ccw(c184.149,8.894) R85.2@185.459,7.583 ; 184.873,7.04 ccw(c184.873,8.169) R85.2@185.672,7.371 ; 185.114,7.04 cw(c185.114,6.552) R85.2@185.459,6.897
NetP3_30: P3.30 R86.2 R94.1 | length 30.5
  Bottom Layer w0.3: P3.30@173.367,21.29 177.4,21.29 179.27,19.42 181.851,19.42 183.181,18.09 R86.2@185.735,18.09 ; P3.30@173.756,20.901 cw(c174.695,19.962) 174.695,21.29 cw(c174.695,22.618) P3.30@173.756,21.679 ; P3.30@173.968,20.689 cw(c175.419,19.238) 175.419,21.29 cw(c175.419,23.342) P3.30@173.968,21.891 ; P3.30@174.18,20.477 cw(c176.143,18.514) 176.143,21.29 cw(c176.143,24.066) P3.30@174.18,22.103 ; 182.096,19.174 ccw(c183.237,20.315) R94.1@183.237,18.702 ; 182.538,18.733 cw(c182.023,18.217) R94.1@182.752,18.217 ; R94.1@182.608,18.662 ccw(c183.237,19.29) R94.1@183.237,18.402 ; R94.1@183.58,17.747 cw(c184.408,16.919) 184.408,18.09 cw(c184.408,19.261) R94.1@183.58,18.433 ; 184.154,18.09 ccw(c184.154,19.944) R86.2@185.465,18.633 ; 184.878,18.09 ccw(c184.878,19.219) R86.2@185.677,18.421 ; 185.12,18.09 cw(c185.12,17.602) R86.2@185.465,17.947
NetP3_31: P3.31 R87.2 R95.1 | length 31.8
  Bottom Layer w0.3: P3.31@180.987,10.29 190.51,10.29 191.75,9.05 R95.1@191.75,7.16 ; P3.31@181.376,9.901 cw(c182.315,8.962) 182.315,10.29 cw(c182.315,11.618) P3.31@181.376,10.679 ; P3.31@181.588,9.689 cw(c183.039,8.238) 183.039,10.29 cw(c183.039,12.342) P3.31@181.588,10.891 ; P3.31@181.8,9.477 cw(c183.763,7.514) 183.763,10.29 cw(c183.763,13.066) P3.31@181.8,11.103 ; R95.1@191.407,7.63 ccw(c190.579,8.458) 191.75,8.458 ccw(c192.921,8.458) R95.1@192.093,7.63 ; R95.1@191.69,7.04 R87.2@194.244,7.04 ; R95.1@192.093,6.69 cw(c192.938,5.845) 192.938,7.04 ; R95.1@192.093,7.376 ccw(c192.904,8.187) 192.904,7.04 ; 192.663,7.04 ccw(c192.663,8.894) R87.2@193.974,7.583 ; 193.388,7.04 ccw(c193.388,8.169) R87.2@194.186,7.371 ; 193.629,7.04 cw(c193.629,6.552) R87.2@193.974,6.897
NetP3_32: P3.32 R88.2 R96.1 | length 31.9
  Bottom Layer w0.3: P3.32@180.987,21.29 190.5,21.29 191.71,20.08 191.71,18.13 R96.1@191.75,18.09 ; P3.32@181.376,20.901 cw(c182.315,19.962) 182.315,21.29 cw(c182.315,22.618) P3.32@181.376,21.679 ; P3.32@181.588,20.689 cw(c183.039,19.238) 183.039,21.29 cw(c183.039,23.342) P3.32@181.588,21.891 ; P3.32@181.8,20.477 cw(c183.763,18.514) 183.763,21.29 cw(c183.763,24.066) P3.32@181.8,22.103 ; R96.1@191.407,18.56 ccw(c190.676,19.291) 191.71,19.291 ; R96.1@191.69,18.09 R88.2@194.244,18.09 ; 191.71,19.484 ccw(c193.017,19.484) R96.1@192.093,18.56 ; R96.1@192.093,17.747 cw(c192.921,16.919) 192.921,18.09 cw(c192.921,19.261) R96.1@192.093,18.433 ; 192.663,18.09 ccw(c192.663,19.944) R88.2@193.974,18.633 ; 193.388,18.09 ccw(c193.388,19.219) R88.2@194.186,18.421 ; 193.629,18.09 cw(c193.629,17.602) R88.2@193.974,17.947
NetQ1_1: Q1.1 R17.2 | length 5.3
  Bottom Layer w0.3: R17.2@63.97,4.754 Q1.1@65.687,4.754 ; R17.2@64.303,4.404 cw(c65.148,3.559) 65.148,4.754 ; R17.2@64.303,5.09 ccw(c65.114,5.901) 65.114,4.754 ; 64.644,4.754 ccw(c64.644,6.223) Q1.1@65.683,5.184 ; 65.368,4.754 ccw(c65.368,5.499) Q1.1@65.895,4.972
NetQ1_3: Q1.3 R25.1 | length 5.7
  Bottom Layer w0.3: Q1.3@66.88,2.897 68.943,2.897 R25.1@69.8,2.04 ; Q1.3@67.127,2.589 cw(c67.87,1.847) 67.87,2.897 ; Q1.3@67.127,3.084 ccw(c67.58,3.537) 67.58,2.897 ; 69.052,2.788 ccw(c69.388,3.124) R25.1@69.592,2.695 ; 69.125,2.715 cw(c68.668,2.257) R25.1@69.315,2.257
NetQ2_1: Q2.1 R18.2 | length 5.2
  Bottom Layer w0.3: R18.2@64.05,15.804 65.767,15.804 Q2.1@66.01,16.047 ; R18.2@64.393,15.461 cw(c65.221,14.633) 65.221,15.804 cw(c65.221,16.975) R18.2@64.393,16.147 ; 64.941,15.804 ccw(c64.941,16.966) Q2.1@65.763,16.144 ; 65.389,15.804 cw(c65.389,15.276) Q2.1@65.763,15.649
NetQ2_3: Q2.3 R26.1 | length 6
  Bottom Layer w0.3: Q2.3@66.96,13.947 69.023,13.947 R26.1@69.88,13.09 ; Q2.3@67.207,13.699 cw(c67.805,13.102) 67.805,13.947 cw(c67.805,14.792) Q2.3@67.207,14.194 ; 69.087,13.883 ccw(c69.602,14.399) R26.1@69.769,13.689 ; 69.142,13.828 cw(c68.531,13.217) R26.1@69.395,13.217
NetQ3_1: Q3.1 R19.2 | length 5.3
  Bottom Layer w0.3: R19.2@72.485,4.754 Q3.1@74.202,4.754 ; R19.2@72.822,4.404 cw(c73.667,3.559) 73.667,4.754 ; R19.2@72.822,5.09 ccw(c73.633,5.901) 73.633,4.754 ; 73.184,4.754 ccw(c73.184,6.223) Q3.1@74.223,5.184 ; 73.908,4.754 ccw(c73.908,5.499) Q3.1@74.435,4.972
NetQ3_3: Q3.3 R27.1 | length 5.6
  Bottom Layer w0.3: Q3.3@75.395,2.897 77.458,2.897 R27.1@78.315,2.04 ; Q3.3@75.667,2.589 cw(c76.41,1.847) 76.41,2.897 ; Q3.3@75.667,3.084 ccw(c76.12,3.537) 76.12,2.897 ; 77.579,2.776 ccw(c77.909,3.106) R27.1@78.12,2.689 ; 77.683,2.671 cw(c77.269,2.257) R27.1@77.855,2.257
NetQ4_1: Q4.1 R20.2 | length 4.9
  Bottom Layer w0.3: R20.2@72.559,15.804 Q4.1@74.277,15.804 ; R20.2@72.906,15.461 cw(c73.734,14.633) 73.734,15.804 cw(c73.734,16.975) R20.2@72.906,16.147 ; 73.601,15.804 ccw(c73.601,16.966) Q4.1@74.423,16.144 ; 74.049,15.804 cw(c74.049,15.276) Q4.1@74.423,15.649
NetQ4_3: Q4.3 R28.1 | length 5.7
  Bottom Layer w0.3: Q4.3@75.469,13.947 77.533,13.947 R28.1@78.389,13.09 ; Q4.3@75.867,13.699 cw(c76.465,13.102) 76.465,13.947 cw(c76.465,14.792) Q4.3@75.867,14.194 ; 77.681,13.798 ccw(c78.126,14.242) R28.1@78.371,13.664 ; R28.1@77.943,13.537 cw(c77.623,13.217) R28.1@78.075,13.217
NetQ5_1: Q5.1 R21.2 | length 5.3
  Bottom Layer w0.3: R21.2@80.999,4.754 Q5.1@82.717,4.754 ; R21.2@81.342,4.404 cw(c82.186,3.559) 82.186,4.754 ; R21.2@81.342,5.09 ccw(c82.153,5.901) 82.153,4.754 ; 81.694,4.754 ccw(c81.694,6.223) Q5.1@82.733,5.184 ; 82.418,4.754 ccw(c82.418,5.499) Q5.1@82.945,4.972
NetQ5_3: Q5.3 R29.1 | length 5.7
  Bottom Layer w0.3: Q5.3@83.909,2.897 85.973,2.897 R29.1@86.829,2.04 ; Q5.3@84.177,2.589 cw(c84.92,1.847) 84.92,2.897 ; Q5.3@84.177,3.084 ccw(c84.63,3.537) 84.63,2.897 ; 86.076,2.793 ccw(c86.415,3.131) R29.1@86.616,2.697 ; 86.139,2.73 cw(c85.665,2.257) R29.1@86.335,2.257
NetQ6_1: Q6.1 R22.2 | length 4.9
  Bottom Layer w0.3: R22.2@81.069,15.804 Q6.1@82.786,15.804 ; R22.2@81.42,15.461 cw(c82.248,14.633) 82.248,15.804 cw(c82.248,16.975) R22.2@81.42,16.147 ; 82.061,15.804 ccw(c82.061,16.966) Q6.1@82.883,16.144 ; 82.509,15.804 cw(c82.509,15.276) Q6.1@82.883,15.649
NetQ6_3: Q6.3 R30.1 | length 5.8
  Bottom Layer w0.3: Q6.3@83.979,13.947 86.042,13.947 R30.1@86.899,13.09 ; Q6.3@84.327,13.699 cw(c84.925,13.102) 84.925,13.947 cw(c84.925,14.792) Q6.3@84.327,14.194 ; 86.156,13.833 ccw(c86.624,14.301) R30.1@86.841,13.675 ; 86.334,13.655 cw(c85.895,13.217) R30.1@86.515,13.217
NetQ7_1: Q7.1 R23.2 | length 5.3
  Bottom Layer w0.3: R23.2@89.514,4.754 Q7.1@91.231,4.754 ; R23.2@89.861,4.404 cw(c90.706,3.559) 90.706,4.754 ; R23.2@89.861,5.09 ccw(c90.672,5.901) 90.672,4.754 ; 90.294,4.754 ccw(c90.294,6.223) Q7.1@91.333,5.184 ; 91.018,4.754 ccw(c91.018,5.499) Q7.1@91.545,4.972
NetQ7_3: Q7.3 R31.1 | length 5.2
  Bottom Layer w0.3: Q7.3@92.424,2.897 94.487,2.897 R31.1@95.344,2.04 ; Q7.3@92.777,2.589 cw(c93.52,1.847) 93.52,2.897 ; Q7.3@92.777,3.084 ccw(c93.23,3.537) 93.23,2.897 ; 94.684,2.7 ccw(c94.99,3.006) R31.1@95.24,2.653
NetQ8_1: Q8.1 R24.2 | length 4.9
  Bottom Layer w0.3: R24.2@89.578,15.804 Q8.1@91.295,15.804 ; R24.2@89.933,15.461 cw(c90.761,14.633) 90.761,15.804 cw(c90.761,16.975) R24.2@89.933,16.147 ; 90.531,15.804 ccw(c90.531,16.966) Q8.1@91.353,16.144 ; 90.979,15.804 cw(c90.979,15.276) Q8.1@91.353,15.649
NetQ8_3: Q8.3 R32.1 | length 5.8
  Bottom Layer w0.3: Q8.3@92.488,13.947 94.551,13.947 R32.1@95.408,13.09 ; Q8.3@92.797,13.699 cw(c93.395,13.102) 93.395,13.947 cw(c93.395,14.792) Q8.3@92.797,14.194 ; 94.676,13.822 ccw(c95.136,14.283) R32.1@95.362,13.672 ; 94.878,13.62 cw(c94.475,13.217) R32.1@95.045,13.217
NetQ9_1: Q9.1 R41.2 | length 5.3
  Bottom Layer w0.3: R41.2@98.029,4.754 Q9.1@99.746,4.754 ; R41.2@98.38,4.404 cw(c99.225,3.559) 99.225,4.754 ; R41.2@98.38,5.09 ccw(c99.191,5.901) 99.191,4.754 ; 98.814,4.754 ccw(c98.814,6.223) Q9.1@99.853,5.184 ; 99.538,4.754 ccw(c99.538,5.499) Q9.1@100.065,4.972
NetQ9_3: Q9.3 R49.1 | length 5.8
  Bottom Layer w0.3: Q9.3@100.939,2.897 103.002,2.897 R49.1@103.859,2.04 ; Q9.3@101.297,2.589 cw(c102.04,1.847) 102.04,2.897 ; Q9.3@101.297,3.084 ccw(c101.75,3.537) 101.75,2.897 ; 103.231,2.668 ccw(c103.532,2.968) R49.1@103.797,2.636 ; R49.1@103.468,2.43 ccw(c103.743,2.705) R49.1@103.985,2.402
NetQ10_1: Q10.1 R42.2 | length 4.9
  Bottom Layer w0.3: R42.2@98.087,15.804 Q10.1@99.805,15.804 ; R42.2@98.446,15.461 cw(c99.274,14.633) 99.274,15.804 cw(c99.274,16.975) R42.2@98.446,16.147 ; 99.111,15.804 ccw(c99.111,16.966) Q10.1@99.933,16.144 ; 99.559,15.804 cw(c99.559,15.276) Q10.1@99.933,15.649
NetQ10_3: Q10.3 R50.1 | length 5.8
  Bottom Layer w0.3: Q10.3@100.997,13.947 103.061,13.947 R50.1@103.917,13.09 ; Q10.3@101.377,13.699 cw(c101.975,13.102) 101.975,13.947 cw(c101.975,14.792) Q10.3@101.377,14.194 ; 103.195,13.812 ccw(c103.649,14.265) R50.1@103.883,13.668 ; 103.423,13.585 cw(c103.055,13.217) R50.1@103.575,13.217
NetQ11_1: Q11.1 R43.2 | length 5.3
  Bottom Layer w0.3: R43.2@106.543,4.754 108.261,4.754 ; R43.2@106.9,4.404 cw(c107.744,3.559) 107.744,4.754 ; R43.2@106.9,5.09 ccw(c107.711,5.901) 107.711,4.754 ; 107.524,4.754 ccw(c107.524,6.223) Q11.1@108.563,5.184 ; 108.248,4.754 ccw(c108.248,5.499) Q11.1@108.775,4.972
NetQ11_3: Q11.3 R51.1 | length 5.9
  Bottom Layer w0.3: Q11.3@109.453,2.897 111.517,2.897 R51.1@112.373,2.04 ; Q11.3@110.007,2.589 cw(c110.75,1.847) 110.75,2.897 ; Q11.3@110.007,3.084 ccw(c110.46,3.537) 110.46,2.897 ; 111.778,2.635 ccw(c112.076,2.933) R51.1@112.357,2.619 ; 112.003,2.411 ccw(c112.288,2.696) R51.1@112.557,2.395
NetQ12_1: Q12.1 R44.2 | length 4.9
  Bottom Layer w0.3: R44.2@106.597,15.804 Q12.1@108.314,15.804 ; R44.2@106.96,15.461 cw(c107.788,14.633) 107.788,15.804 cw(c107.788,16.975) R44.2@106.96,16.147 ; 107.631,15.804 ccw(c107.631,16.966) Q12.1@108.453,16.144 ; 108.079,15.804 cw(c108.079,15.276) Q12.1@108.453,15.649
NetQ12_3: Q12.3 R52.1 | length 6.2
  Bottom Layer w0.3: Q12.3@109.507,13.947 111.57,13.947 R52.1@112.427,13.09 ; Q12.3@109.897,13.699 cw(c110.495,13.102) 110.495,13.947 cw(c110.495,14.792) Q12.3@109.897,14.194 ; 111.735,13.782 ccw(c112.17,14.217) R52.1@112.427,13.658 ; R52.1@112.036,13.481 cw(c111.772,13.217) R52.1@112.145,13.217 ; R52.1@112.04,13.477 ccw(c112.362,13.799) R52.1@112.553,13.385
NetQ13_1: Q13.1 R45.2 | length 5.3
  Bottom Layer w0.3: R45.2@115.058,4.754 116.775,4.754 ; R45.2@115.419,4.404 cw(c116.264,3.559) 116.264,4.754 ; R45.2@115.419,5.09 ccw(c116.23,5.901) 116.23,4.754 ; 116.084,4.754 ccw(c116.084,6.223) Q13.1@117.123,5.184 ; 116.808,4.754 ccw(c116.808,5.499) Q13.1@117.335,4.972
NetQ13_3: Q13.3 R53.1 | length 5.9
  Bottom Layer w0.3: Q13.3@117.968,2.897 120.031,2.897 R53.1@120.888,2.04 ; Q13.3@118.567,2.589 cw(c119.31,1.847) 119.31,2.897 ; Q13.3@118.567,3.084 ccw(c119.02,3.537) 119.02,2.897 ; 120.311,2.617 ccw(c120.608,2.914) R53.1@120.897,2.609 ; 120.529,2.399 ccw(c120.82,2.69) R53.1@121.103,2.391
NetQ14_1: Q14.1 R46.2 | length 4.9
  Bottom Layer w0.3: R46.2@115.106,15.804 Q14.1@116.823,15.804 ; R46.2@115.473,15.461 cw(c116.301,14.633) 116.301,15.804 cw(c116.301,16.975) R46.2@115.473,16.147 ; 116.121,15.804 ccw(c116.121,16.966) Q14.1@116.943,16.144 ; 116.569,15.804 cw(c116.569,15.276) Q14.1@116.943,15.649
NetQ14_3: Q14.3 R54.1 | length 5.9
  Bottom Layer w0.3: Q14.3@118.016,13.947 120.079,13.947 R54.1@120.936,13.09 ; Q14.3@118.387,13.699 cw(c118.985,13.102) 118.985,13.947 cw(c118.985,14.792) Q14.3@118.387,14.194 ; 120.175,13.851 ccw(c120.658,14.335) R54.1@120.858,13.681 ; 120.307,13.719 cw(c119.805,13.217) R54.1@120.515,13.217
NetQ15_1: Q15.1 R47.2 | length 5.3
  Bottom Layer w0.3: R47.2@123.573,4.754 125.29,4.754 ; R47.2@123.938,4.404 cw(c124.783,3.559) 124.783,4.754 ; R47.2@123.938,5.09 ccw(c124.749,5.901) 124.749,4.754 ; 124.544,4.754 ccw(c124.544,6.223) Q15.1@125.583,5.184 ; 125.268,4.754 ccw(c125.268,5.499) Q15.1@125.795,4.972
NetQ15_3: Q15.3 R55.1 | length 5.8
  Bottom Layer w0.3: Q15.3@126.483,2.897 128.546,2.897 R55.1@129.403,2.04 ; Q15.3@127.027,2.589 cw(c127.77,1.847) 127.77,2.897 ; Q15.3@127.027,3.084 ccw(c127.48,3.537) 127.48,2.897 ; 128.798,2.645 ccw(c129.097,2.943) R55.1@129.373,2.624 ; 129.026,2.417 ccw(c129.308,2.699) R55.1@129.569,2.397
NetQ16_1: Q16.1 R48.2 | length 4.9
  Bottom Layer w0.3: R48.2@123.615,15.804 Q16.1@125.333,15.804 ; R48.2@123.986,15.461 cw(c124.814,14.633) 124.814,15.804 cw(c124.814,16.975) R48.2@123.986,16.147 ; 124.571,15.804 ccw(c124.571,16.966) Q16.1@125.393,16.144 ; 125.019,15.804 cw(c125.019,15.276) Q16.1@125.393,15.649
NetQ16_3: Q16.3 R56.1 | length 6
  Bottom Layer w0.3: Q16.3@126.525,13.947 128.589,13.947 R56.1@129.445,13.09 ; Q16.3@126.837,13.699 cw(c127.435,13.102) 127.435,13.947 cw(c127.435,14.792) Q16.3@126.837,14.194 ; 128.669,13.866 ccw(c129.167,14.363) R56.1@129.352,13.685 ; 128.766,13.769 cw(c128.214,13.217) R56.1@128.995,13.217
NetQ17_1: Q17.1 R65.2 | length 5.3
  Bottom Layer w0.3: R65.2@132.087,4.754 133.805,4.754 ; R65.2@132.458,4.404 cw(c133.302,3.559) 133.302,4.754 ; R65.2@132.458,5.09 ccw(c133.269,5.901) 133.269,4.754 ; 133.114,4.754 ccw(c133.114,6.223) Q17.1@134.153,5.184 ; 133.838,4.754 ccw(c133.838,5.499) Q17.1@134.365,4.972
NetQ17_3: Q17.3 R73.1 | length 5.9
  Bottom Layer w0.3: Q17.3@134.997,2.897 137.061,2.897 R73.1@137.917,2.04 ; Q17.3@135.597,2.589 cw(c136.34,1.847) 136.34,2.897 ; Q17.3@135.597,3.084 ccw(c136.05,3.537) 136.05,2.897 ; 137.325,2.632 ccw(c137.623,2.93) R73.1@137.905,2.617 ; 137.549,2.409 ccw(c137.835,2.695) R73.1@138.106,2.394
NetQ18_1: Q18.1 R66.2 | length 4.9
  Bottom Layer w0.3: R66.2@132.125,15.804 Q18.1@133.842,15.804 ; R66.2@132.5,15.461 cw(c133.328,14.633) 133.328,15.804 cw(c133.328,16.975) R66.2@132.5,16.147 ; 132.871,15.804 ccw(c132.871,16.966) Q18.1@133.693,16.144 ; 133.319,15.804 cw(c133.319,15.276) Q18.1@133.693,15.649
NetQ18_3: Q18.3 R74.1 | length 12.3
  Bottom Layer w0.3: Q18.3@135.137,13.699 cw(c135.735,13.102) 135.735,13.947 cw(c135.735,14.792) Q18.3@135.137,14.194 ; 135.713,13.947 cw(c135.713,11.339) R74.1@137.643,13.093 ; 136.391,13.947 cw(c136.391,11.955) R74.1@137.865,13.294 ; 137.069,13.947 cw(c137.069,12.571) R74.1@138.087,13.496 ; R74.1@137.421,12.891 ccw(c135.035,10.723) 135.035,13.947 137.098,13.947 R74.1@137.955,13.09
NetQ19_1: Q19.1 R67.2 | length 5.3
  Bottom Layer w0.3: R67.2@140.602,4.754 Q19.1@142.319,4.754 ; R67.2@140.977,4.404 cw(c141.822,3.559) 141.822,4.754 ; R67.2@140.977,5.09 ccw(c141.788,5.901) 141.788,4.754 ; 141.494,4.754 ccw(c141.494,6.223) Q19.1@142.533,5.184 ; 142.218,4.754 ccw(c142.218,5.499) Q19.1@142.745,4.972
NetQ19_3: Q19.3 R75.1 | length 5.2
  Bottom Layer w0.3: Q19.3@143.512,2.897 145.575,2.897 R75.1@146.432,2.04 ; Q19.3@143.977,2.589 cw(c144.72,1.847) 144.72,2.897 ; Q19.3@143.977,3.084 ccw(c144.43,3.537) 144.43,2.897 ; 145.783,2.689 ccw(c146.087,2.993) R75.1@146.342,2.647
NetQ20_1: Q20.1 R68.2 | length 4.9
  Bottom Layer w0.3: R68.2@140.634,15.804 Q20.1@142.351,15.804 ; R68.2@141.013,15.461 cw(c141.841,14.633) 141.841,15.804 cw(c141.841,16.975) R68.2@141.013,16.147 ; R68.2@141.251,15.804 ccw(c141.251,16.966) Q20.1@142.073,16.144 ; 141.699,15.804 cw(c141.699,15.276) Q20.1@142.073,15.649
NetQ20_3: Q20.3 R76.1 | length 12
  Bottom Layer w0.3: Q20.3@143.517,13.699 cw(c144.115,13.102) 144.115,13.947 cw(c144.115,14.792) Q20.3@143.517,14.194 ; 144.19,13.947 cw(c144.19,11.554) R76.1@146.019,13.098 ; 144.836,13.947 cw(c144.836,12.099) R76.1@146.248,13.291 ; 145.482,13.947 cw(c145.482,12.645) R76.1@146.477,13.485 ; R76.1@145.789,12.904 ccw(c143.544,11.008) 143.544,13.947 145.607,13.947 R76.1@146.464,13.09
NetQ21_1: Q21.1 R69.2 | length 5.3
  Bottom Layer w0.3: R69.2@149.117,4.754 Q21.1@150.834,4.754 ; R69.2@149.496,4.404 cw(c150.341,3.559) 150.341,4.754 ; R69.2@149.496,5.09 ccw(c150.307,5.901) 150.307,4.754 ; 149.864,4.754 ccw(c149.864,6.223) Q21.1@150.903,5.184 ; 150.588,4.754 ccw(c150.588,5.499) Q21.1@151.115,4.972
NetQ21_3: Q21.3 R77.1 | length 5.7
  Bottom Layer w0.3: Q21.3@152.027,2.897 154.09,2.897 R77.1@154.947,2.04 ; Q21.3@152.347,2.589 cw(c153.09,1.847) 153.09,2.897 ; Q21.3@152.347,3.084 ccw(c152.8,3.537) 152.8,2.897 ; 154.2,2.787 ccw(c154.535,3.122) R77.1@154.74,2.694 ; 154.278,2.709 cw(c153.826,2.257) R77.1@154.465,2.257
NetQ22_1: Q22.1 R70.2 | length 4.9
  Bottom Layer w0.3: R70.2@149.143,15.804 Q22.1@150.861,15.804 ; R70.2@149.526,15.461 cw(c150.354,14.633) 150.354,15.804 cw(c150.354,16.975) R70.2@149.526,16.147 ; 149.851,15.804 ccw(c149.851,16.966) Q22.1@150.673,16.144 ; 150.299,15.804 cw(c150.299,15.276) Q22.1@150.673,15.649
NetQ22_3: Q22.3 R78.1 | length 12.2
  Bottom Layer w0.3: Q22.3@152.117,13.699 cw(c152.715,13.102) 152.715,13.947 cw(c152.715,14.792) Q22.3@152.117,14.194 ; 152.724,13.947 cw(c152.724,11.387) R78.1@154.632,13.094 ; 153.395,13.947 cw(c153.395,11.987) R78.1@154.856,13.294 ; 154.066,13.947 cw(c154.066,12.587) R78.1@155.079,13.494 ; R78.1@154.409,12.894 ccw(c152.053,10.787) 152.053,13.947 154.117,13.947 R78.1@154.973,13.09
NetQ23_1: Q23.1 R71.2 | length 5.3
  Bottom Layer w0.3: R71.2@157.631,4.754 Q23.1@159.349,4.754 ; R71.2@158.016,4.404 cw(c158.86,3.559) 158.86,4.754 ; R71.2@158.016,5.09 ccw(c158.827,5.901) 158.827,4.754 ; R71.2@158.174,4.754 ccw(c158.174,6.223) Q23.1@159.213,5.184 ; 158.898,4.754 ccw(c158.898,5.499) Q23.1@159.425,4.972
NetQ23_3: Q23.3 R79.1 | length 10.8
  Bottom Layer w0.3: Q23.3@160.541,2.897 162.605,2.897 R79.1@163.461,2.04 ; Q23.3@160.584,2.897 cw(c160.584,-0.459) R79.1@162.957,1.914 ; Q23.3@160.657,2.589 cw(c161.4,1.847) 161.4,2.897 ; Q23.3@160.657,3.084 ccw(c161.11,3.537) 161.11,2.897 ; 161.309,2.897 cw(c161.309,0.266) R79.1@163.169,2.126 ; 162.033,2.897 cw(c162.033,0.99) R79.1@163.381,2.338
NetQ24_1: Q24.1 R72.2 | length 4.9
  Bottom Layer w0.3: R72.2@157.653,15.804 Q24.1@159.37,15.804 ; R72.2@158.04,15.461 cw(c158.868,14.633) 158.868,15.804 cw(c158.868,16.975) R72.2@158.04,16.147 ; 158.441,15.804 ccw(c158.441,16.966) Q24.1@159.263,16.144 ; 158.889,15.804 cw(c158.889,15.276) Q24.1@159.263,15.649
NetQ24_3: Q24.3 R80.1 | length 6.1
  Bottom Layer w0.3: Q24.3@160.563,13.947 162.626,13.947 R80.1@163.483,13.09 ; Q24.3@160.707,13.699 cw(c161.305,13.102) 161.305,13.947 cw(c161.305,14.792) Q24.3@160.707,14.194 ; R80.1@162.896,13.249 ccw(c162.011,13.307) 162.638,13.935 ccw(c163.223,14.519) R80.1@163.322,13.698
NetQ25_1: Q25.1 R89.2 | length 5.3
  Bottom Layer w0.3: R89.2@166.146,4.754 Q25.1@167.863,4.754 ; R89.2@166.535,4.404 cw(c167.38,3.559) 167.38,4.754 ; R89.2@166.535,5.09 ccw(c167.346,5.901) 167.346,4.754 ; 166.904,4.754 ccw(c166.904,6.223) Q25.1@167.943,5.184 ; 167.628,4.754 ccw(c167.628,5.499) Q25.1@168.155,4.972
NetQ25_3: Q25.3 R97.1 | length 5.6
  Bottom Layer w0.3: Q25.3@169.056,2.897 171.119,2.897 R97.1@171.976,2.04 ; Q25.3@169.387,2.589 cw(c170.13,1.847) 170.13,2.897 ; Q25.3@169.387,3.084 ccw(c169.84,3.537) 169.84,2.897 ; 171.26,2.756 ccw(c171.582,3.078) R97.1@171.804,2.681 ; R97.1@171.411,2.605 cw(c171.062,2.257) R97.1@171.555,2.257
NetQ26_1: Q26.1 R90.2 | length 4.9
  Bottom Layer w0.3: R90.2@166.162,15.804 Q26.1@167.879,15.804 ; R90.2@166.553,15.461 cw(c167.381,14.633) 167.381,15.804 cw(c167.381,16.975) R90.2@166.553,16.147 ; 166.911,15.804 ccw(c166.911,16.966) Q26.1@167.733,16.144 ; 167.359,15.804 cw(c167.359,15.276) Q26.1@167.733,15.649
NetQ26_3: Q26.3 R98.1 | length 13.9
  Bottom Layer w0.3: Q26.3@169.177,13.699 cw(c169.775,13.102) 169.775,13.947 cw(c169.775,14.792) Q26.3@169.177,14.194 ; 169.766,13.947 cw(c169.766,11.231) R98.1@171.745,13.09 ; 170.459,13.947 cw(c170.459,11.882) R98.1@171.964,13.296 ; 171.152,13.947 cw(c171.152,12.534) R98.1@172.182,13.501 ; R98.1@171.396,13.254 ccw(c170.524,13.321) 171.143,13.939 ccw(c171.735,14.531) R98.1@171.827,13.699 ; R98.1@171.527,12.885 ccw(c169.072,10.579) 169.072,13.947 171.135,13.947 R98.1@171.992,13.09
NetQ27_1: Q27.1 R91.2 | length 5.3
  Bottom Layer w0.3: R91.2@174.661,4.754 Q27.1@176.378,4.754 ; R91.2@175.054,4.404 cw(c175.899,3.559) 175.899,4.754 ; R91.2@175.054,5.09 ccw(c175.865,5.901) 175.865,4.754 ; 175.374,4.754 ccw(c175.374,6.223) Q27.1@176.413,5.184 ; 176.098,4.754 ccw(c176.098,5.499) Q27.1@176.625,4.972